# Altium PCB epic.PcbDoc
Units mm, origin at the board's own origin, x right, y up, seen from the top; angles counter-clockwise.
Board outline 36.98 x 50.8 mm, 2 copper layers (Top Layer, Bottom Layer); 67 components, 52 nets, 308 pads, 144 vias.
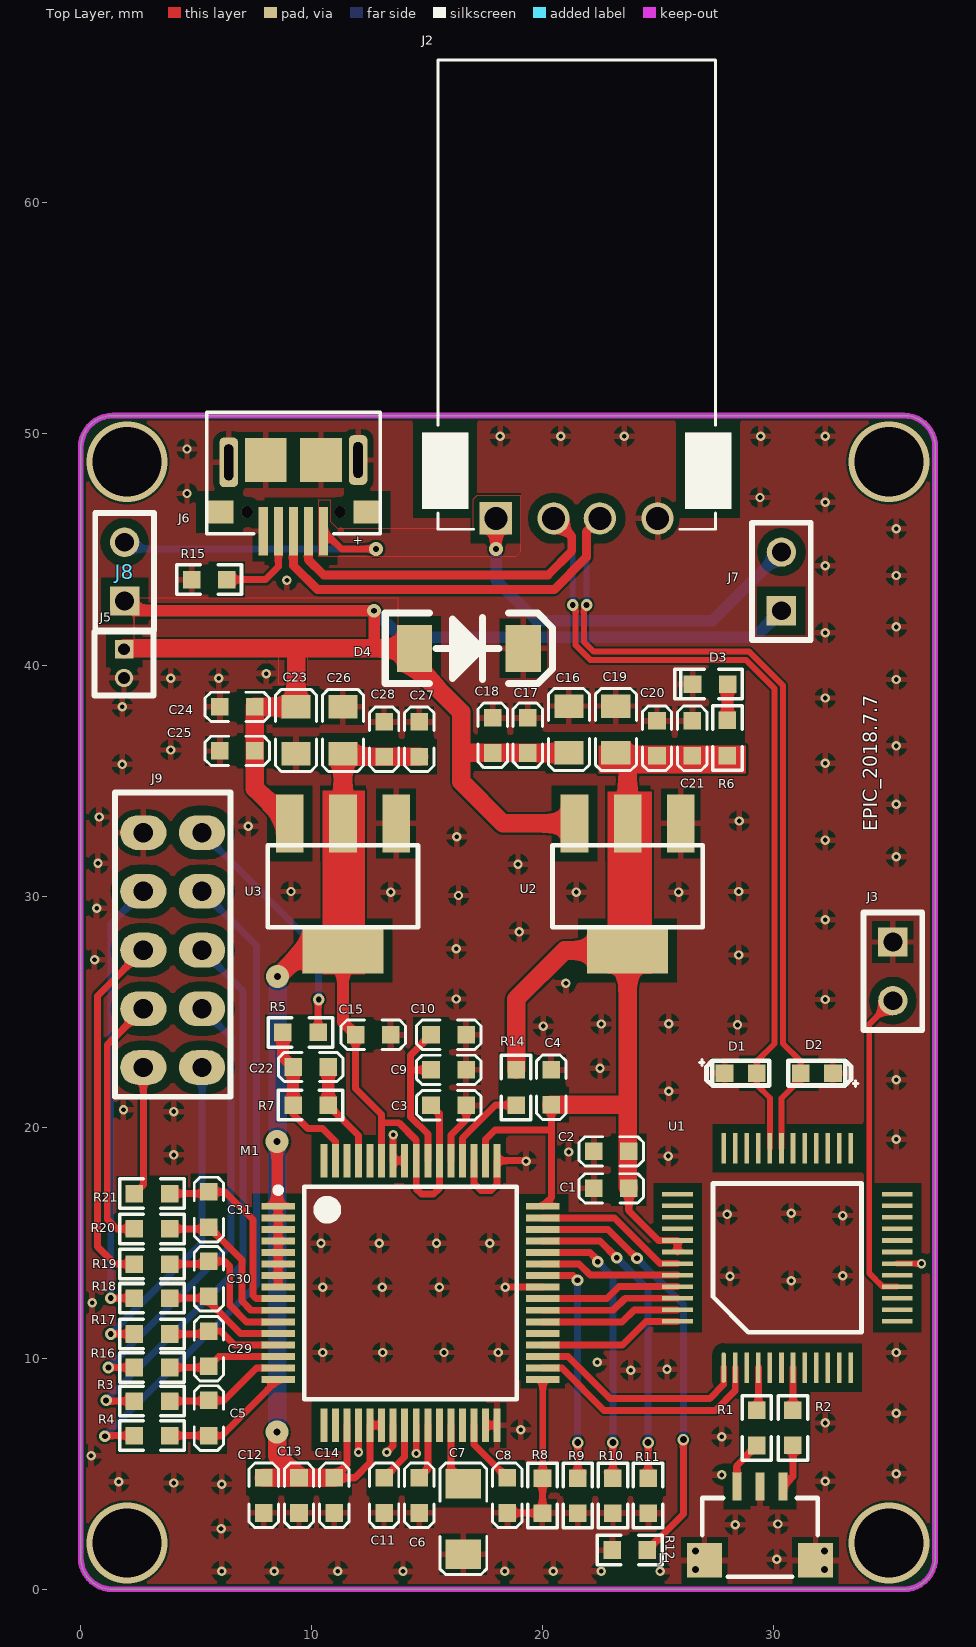
[diagram p0: Top Layer view]
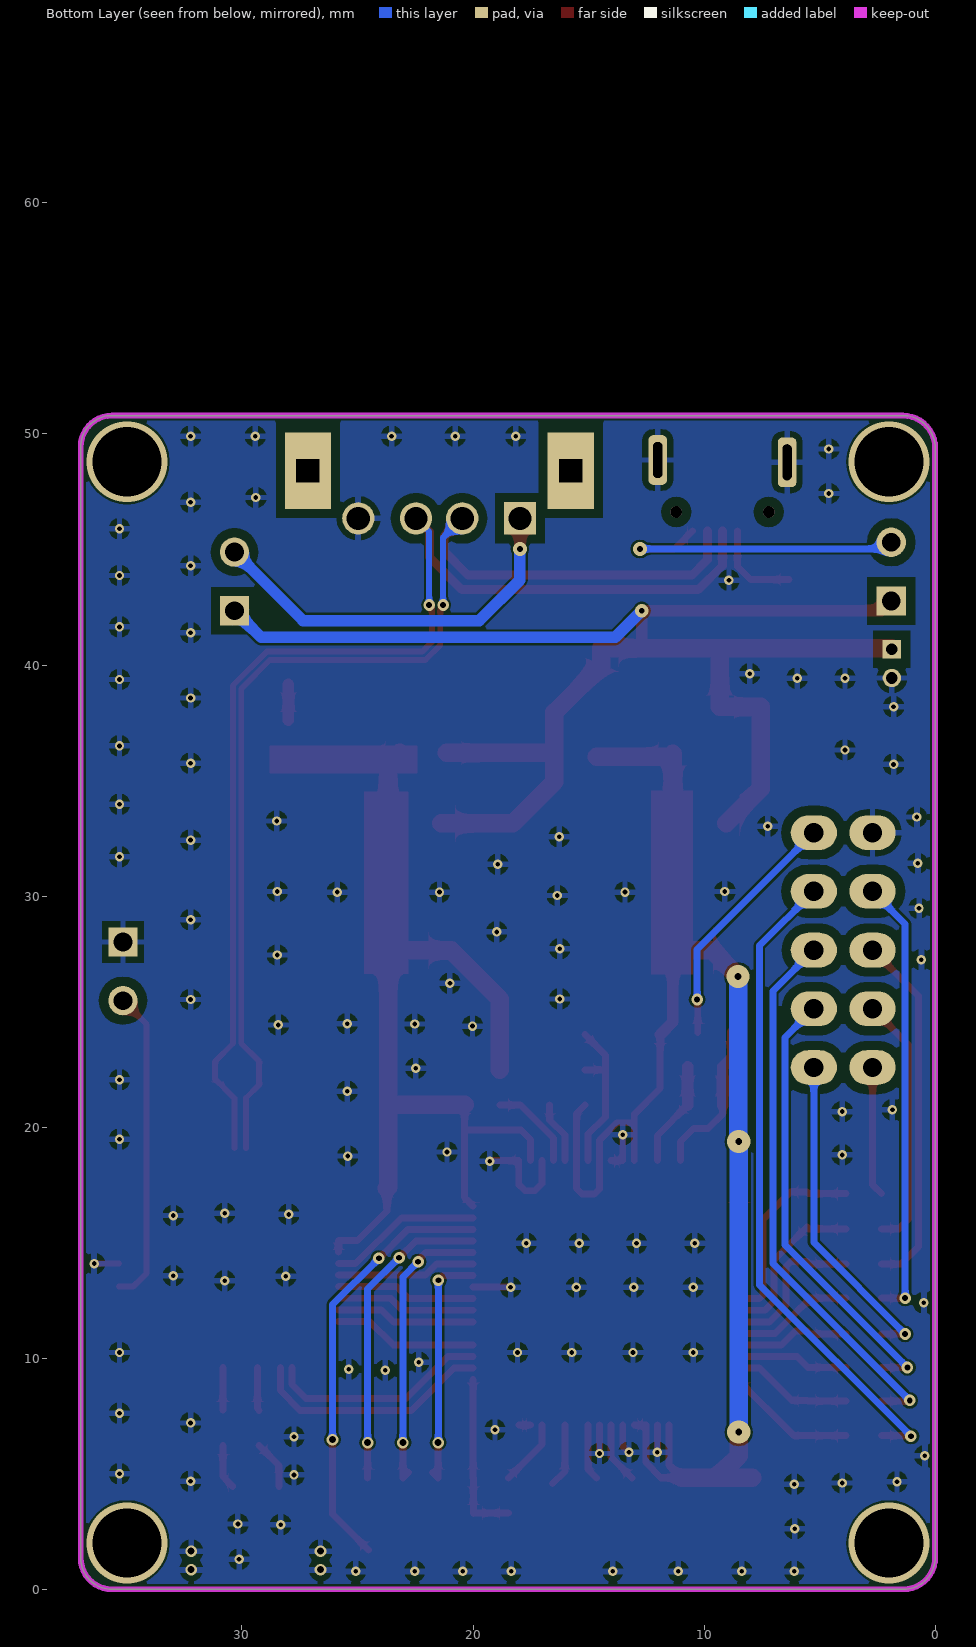
[diagram p1: Bottom Layer view, seen from below]
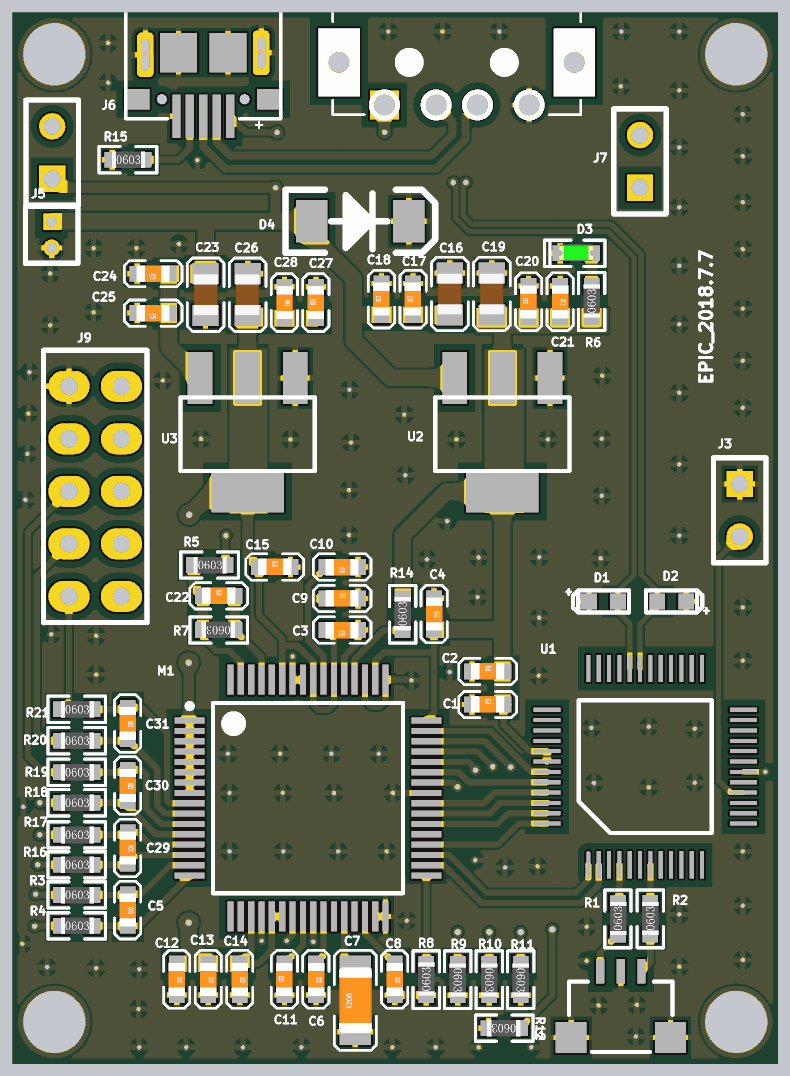
[diagram p2: 3D render of the assembled board from above, using the file's embedded part models]

## Layer stack, top to bottom
Top Solder: solder mask 0.0102, Solder Resist, Dk 3.5
Top Layer: signal copper 0.0356
Dielectric 1: dielectric 0.32, FR-4, Dk 4.8
Bottom Layer: signal copper 0.0356
Bottom Solder: solder mask 0.0102, Solder Resist, Dk 3.5

## Board outline
1.375,0 cw(c1.375,1.375) 0,1.375 0,49.4 cw(c1.4,49.4) 1.4,50.8 35.625,50.8 cw(c35.625,49.445) 36.98,49.445 36.98,1.355 cw(c35.625,1.355) 35.625,0

## Design rules (kind name [scope] priority, off if disabled: settings)
Clearance [All] p1: gap=0.1 except(0.4: SMDPad-Poly THPad-Poly)
DiffPairsRouting [All] p1: maxlimit=0.254 minlimit=0.1 mostfreqgap=0.1 toplayer_minwidth=0.2 toplayer_maxwidth=0.381 toplayer_prefwidth=0.2 bottomlayer_minwidth=0.2 bottomlayer_maxwidth=0.381 bottomlayer_prefwidth=0.2 maxuncoupledlength=12.7
HoleToHoleClearance [All] p1: gap=0.051 allowstackedmicrovias=TRUE
MinimumSolderMaskSliver [All] p1: minsoldermaskwidth=0.051
PolygonConnect [All] p1: connectstyle=Relief reliefconductorwidth=0.254 reliefentries=4 polygonreliefangle="90 Angle" airgapwidth=0.254
RoutingVias [All] p1: holewidth=0.254 width=0.5 viastyle="Through Hole" minholewidth=0.254 minwidth=0.5 maxholewidth=0.3 maxwidth=1.27
SilkToSilkClearance [All] p1: silktosilkclearance=0.051
SilkToSolderMaskClearance [IsPad] p1: minsilkscreentomaskgap=0.051 clearancetoexposedcopper=TRUE
SolderMaskExpansion [All] p1: expansion=0.102
Width [All] p1: maxlimit=0.8 minlimit=0.254 preferedwidth=0.6
25 further rules are at their usual default settings.

## Components (designator, comment, footprint, x,y, rotation, side; value= is the part's Value field where it differs from the comment)
C1 "104K50V" C0603 22.201,17.35 r0 top
C2 "106K50V" C0603 22.201,18.95 r0 top
C3 "105K16V" C0603 16.685,20.955 r180 top
C4 "105K16V" C0603 20.368,22.492 r270 top
C5 "101K10V" C0603 5.55,8.174 r270 top
C6 "105K16V" C0603 14.653,4.826 r270 top
C7 "C1206 100uF" C1206 16.558,1.524 r90 top
C8 "105K16V" C0603 18.463,4.826 r270 top
C9 "105K16V" C0603 15.161,22.479 r0 top
C10 "104K50V" C0603 16.685,24.003 r180 top
C11 "106K50V" C0603 13.129,3.302 r90 top
C12 "105K16V" C0603 7.922,4.826 r270 top
C13 "105K16V" C0603 9.446,4.826 r270 top
C14 "105K16V" C0603 10.97,4.826 r270 top
C15 "105K16V" C0603 11.901,24.003 r0 top
C16 "226M50V" C0805 21.13,36.195 r90 top
C17 "106K50V" C0603 19.352,36.195 r90 top
C18 "105K16V" C0603 17.828,36.195 r90 top
C19 "226M50V" C0805 23.162,36.195 r90 top
C20 "105K16V" C0603 24.94,36.068 r90 top
C21 "104K50V" C0603 26.464,37.592 r270 top
C22 "152K16V" C0603 9.192,22.606 r0 top
C23 "226M50V" C0805 9.319,38.188 r270 top
C24 "106K50V" C0603 7.541,38.188 r180 top
C25 "105K16V" C0603 7.541,36.283 r180 top
C26 "226M50V" C0805 11.351,36.156 r90 top
C27 "105K16V" C0603 14.653,36.029 r90 top
C28 "104K50V" C0603 13.129,37.553 r270 top
C29 "101K10V" C0603 5.55,11.175 r270 top
C30 "101K10V" C0603 5.55,14.199 r270 top
C31 "101K10V" C0603 5.55,17.199 r270 top
D1 "ESDA_TR1/0603" HS_0603D 28.559,22.34 r0 top
D2 "ESDA_TR1/0603" HS_0603D 31.861,22.34 r180 top
D3 "LED0603G" D-LED0603G 28,39.175 r180 top
D4 "SMAJ5.0CA" DO-214 14.45,40.725 r0 top
J1 "SH1.0-T-1-LT-3A" J-SH1.0-T-1-LT-3A 30.4,4.45 r180 top
J2 "Header 4" USB-AB 17.967,46.349 r0 top
J3 "S2.54-2P" S2.54-2P 35.15,28.015 r270 top
J5 "J-ZH1.25" ZH1.25_2P 1.875,40.69 r270 top
J6 "USB-MINI-SOCKET" "MICRO-USB - 5.9" 12.956,50.932 r180 top
J7 "S2.54-2P" S2.54-2P 30.325,42.35 r90 top
J8 "S2.54-2P" S2.54-2P 1.9,42.775 r90 top
J9 "D2.54-2X5P" D2.54-2X5P 2.71,22.585 r90 top
M1 "ADS1299" ADS1299-TSQFP50P1200X1200X105-64N 14.272,12.827 r0 top
R1 "22RF" R0603 29.258,6.223 r90 top
R2 "22RF" R0603 30.825,6.226 r90 top
R3 "10KF" R0603 2.326,8.144 r0 top
R4 "10KF" R0603 2.326,6.65 r0 top
R5 "10KF" R0603 8.751,24.1 r0 top
R6 "2KF" R0603 27.988,36.081 r90 top
R7 "1MF" R0603 10.716,20.955 r180 top
R8 "0R" R0603 19.987,3.289 r90 top
R9 "10KF" R0603 21.511,4.813 r270 top
R10 "10KF" R0603 23.035,4.813 r270 top
R11 "10KF" R0603 24.559,4.813 r270 top
R12 "10KF" R0603 24.525,1.7 r180 top
R14 "10KF" R0603 18.844,20.955 r90 top
R15 "0R" R0603 4.8,43.7 r0 top
R16 "10KF" R0603 2.326,9.6 r0 top
R17 "10KF" R0603 2.326,11.05 r0 top
R18 "10KF" R0603 2.326,12.6 r0 top
R19 "10KF" R0603 2.326,14.075 r0 top
R20 "10KF" R0603 2.326,15.6 r0 top
R21 "10KF" R0603 2.326,17.125 r0 top
U1 "CH559L" LQFP48 27.829,9.597 r90 top
U2 "AMS1117-3.3V" SOT-223 23.67,33.147 r180 top
U3 "AMS1117-5V" SOT-223 11.351,33.147 r180 top

## Footprints (in the part's own frame and the unit in brackets; to place one, negate y for a bottom-side part, rotate by r counter-clockwise, add the part's x,y. Pads: shape width x height; smd on the part's side, far side on the other; paste and mask are expansions set on the pad)
ADS1299-TSQFP50P1200X1200X105-64N [mm] "TSQFP, 64-Leads, Body 10.00x10.00mm, Pitch 0.50mm, IPC Medium Density"
  rect 1.45x0.3 smd: 1(-5.725,3.75) 2(-5.725,3.25) 3(-5.725,2.75) 4(-5.725,2.25) 5(-5.725,1.75) 6(-5.725,1.25) 7(-5.725,0.75) 8(-5.725,0.25) 9(-5.725,-0.25) 10(-5.725,-0.75) 11(-5.725,-1.25) 12(-5.725,-1.75) 13(-5.725,-2.25) 14(-5.725,-2.75) 15(-5.725,-3.25) 16(-5.725,-3.75) 33(5.725,-3.75) 34(5.725,-3.25) 35(5.725,-2.75) 36(5.725,-2.25) 37(5.725,-1.75) 38(5.725,-1.25) 39(5.725,-0.75) 40(5.725,-0.25) 41(5.725,0.25) 42(5.725,0.75) 43(5.725,1.25) 44(5.725,1.75) 45(5.725,2.25) 46(5.725,2.75) 47(5.725,3.25) 48(5.725,3.75)
  rect 0.3x1.45 smd: 17(-3.75,-5.725) 18(-3.25,-5.725) 19(-2.75,-5.725) 20(-2.25,-5.725) 21(-1.75,-5.725) 22(-1.25,-5.725) 23(-0.75,-5.725) 24(-0.25,-5.725) 25(0.25,-5.725) 26(0.75,-5.725) 27(1.25,-5.725) 28(1.75,-5.725) 29(2.25,-5.725) 30(2.75,-5.725) 31(3.25,-5.725) 32(3.75,-5.725) 49(3.75,5.725) 50(3.25,5.725) 51(2.75,5.725) 52(2.25,5.725) 53(1.75,5.725) 54(1.25,5.725) 55(0.75,5.725) 56(0.25,5.725) 57(-0.25,5.725) 58(-0.75,5.725) 59(-1.25,5.725) 60(-1.75,5.725) 61(-2.25,5.725) 62(-2.75,5.725) 63(-3.25,5.725) 64(-3.75,5.725)
  silkscreen extent -5.85,-4.6 4.6,4.6, body extent -5,-5 5,5, height 1.05
C0603 [mil]
  rect 30x30 smd: 1(0,0) 2(60,0)
  silkscreen extent -25,-25 85,25, body extent -1,-15 61,16, height 12
C0805 [mil]
  rect 40x50 smd: 1(0,0) 2(80,0)
  silkscreen extent -30,-35 110,35, body extent 1,-23 79,24, height 37
C1206 [mil]
  rect 50x60 smd: 1(0,0) 2(120,0)
  silkscreen extent -35,-40 155,40, body extent -3,-32 123,31, height 39
D2.54-2X5P [mm] "DUAL_ROW_Pin_R2.54-5P"
  oval 1.5x2 hole 0.838: 1(0,0) 2(0,-2.54) 3(2.54,0) 4(2.54,-2.54) 5(5.08,0) 6(5.08,-2.54) 7(7.62,0) 8(7.62,-2.54) 9(10.16,0) 10(10.16,-2.54)
  silkscreen extent -1.27,-3.77 11.9,1.23, body extent -1.27,-3.82 11.6,1.26, height 10
D-LED0603G [mil]
  rect 30x30 smd: 1(0,0) 2(60,0)
  silkscreen extent -25,-25 90,25, body extent -2,-16 62,15, height 24
DO-214 [mil]
  rect 60x80 smd: 1(0,0) 2(185,0)
  silkscreen extent -50,-60 235,60
HS_0603D [mil]
  rect 30x30 smd: 1(-27.5,0) 2(27.5,0)
  silkscreen extent -70,-21 49,23
J-SH1.0-T-1-LT-3A [mm]
  rect 0.4x1.2 smd: 1(0,0) 2(1,0) 3(2,0)
  rect 1.5x1.5 smd: 4(-1.4,3.2) 5(3.4,3.2)
  silkscreen extent -1.5,0.5 3.5,3.9
LQFP48 [mm]
  oval 1.321x0.2 smd: 1(0,0)
  rect 1.321x0.2 smd: 2(0,-0.5) 3(0,-1) 4(0,-1.5) 5(0,-2) 6(0,-2.5) 7(0,-3) 8(0,-3.5) 9(0,-4) 10(0,-4.5) 11(0,-5) 12(0,-5.5) 25(9.5,-5.5) 26(9.5,-5) 27(9.5,-4.5) 28(9.5,-4) 29(9.5,-3.5) 30(9.5,-3) 31(9.5,-2.5) 32(9.5,-2) 33(9.5,-1.5) 34(9.5,-1) 35(9.5,-0.5) 36(9.5,0)
  rect 0.2x1.321 smd: 13(2,-7.5) 14(2.5,-7.5) 15(3,-7.5) 16(3.5,-7.5) 17(4,-7.5) 18(4.5,-7.5) 19(5,-7.5) 20(5.5,-7.5) 21(6,-7.5) 22(6.5,-7.5) 23(7,-7.5) 24(7.5,-7.5) 37(7.5,2) 38(7,2) 39(6.5,2) 40(6,2) 41(5.5,2) 42(5,2) 43(4.5,2) 44(4,2) 45(3.5,2) 46(3,2) 47(2.5,2) 48(2,2)
  silkscreen extent 1.54,-5.96 7.96,0.47
"MICRO-USB - 5.9" [mm]
  rect 1.2x1 smd: 0(0.55,4.307) 0(6.95,4.307)
  rect 0.4x2.1 smd: 1(2.45,5.132) 2(3.1,5.132) 3(3.75,5.132) 4(4.4,5.132) 5(5.05,5.132)
  rrect50% 0.8x2.15 hole 0.4 slot 1.55 at 90 deg: 6(0.95,2.057) 6(6.55,2.157)
  rect 1.8x1.9 smd: 6(2.556,2.057) 6(4.943,2.057)
  round 0.5 hole 0.5 unplated: ""(1.75,4.307) ""(5.75,4.307)
  silkscreen extent 0,0 7.5,5.25
R0603 [mil]
  rect 30x30 smd: 1(0,0) 2(60,0)
  silkscreen extent -25,-25 85,25, body extent 0,-16 62,15, height 18
S2.54-2P [mil]
  rect 50x50 hole 32: 1(0,0)
  round 50 hole 32: 2(100,0)
  silkscreen extent -50,-50 150,50, body extent -50,-50 150,50, height 315
SOT-223 [mm]
  rect 1.2x2.5 smd: 1(-2.3,0) 2(0,0) 3(2.3,0)
  rect 3.5x2 smd: 2(0,5.5)
  silkscreen extent -3.25,0.94 3.25,4.5
USB-AB [mm]
  rect 2x3.3 hole 1 square: 0(-2.199,2.06) 0(9.18,2.06)
  round 0.127 on Mech4: 1(-2.59,1.32) 1(-2.59,1.32) 1(-2.59,2.8) 1(-2.59,2.8) 1(-2.5,-0.47) 1(-2.5,-0.47) 1(-2.5,0.23) 1(-2.5,4.03) 1(-2.5,19.83) 1(-2.5,19.83) 1(-1.79,1.32) 1(-1.79,1.32) 1(-1.79,2.8) 1(-1.79,2.8) 1(-0.973,-0.47) 1(7.969,-0.47) 1(8.79,1.32) 1(8.79,1.32) 1(8.79,2.8) 1(8.79,2.8) 1(9.5,-0.47) 1(9.5,-0.47) 1(9.5,0.23) 1(9.5,4.03) 1(9.5,19.83) 1(9.5,19.83) 1(9.59,1.32) 1(9.59,1.32) 1(9.59,2.8) 1(9.59,2.8)
  rect 1.397x1.397 hole 1: 1(0,0)
  round 1.5 on Top Overlay: 1(0,0) 1(2.5,0) 1(4.5,0) 1(7,0)
  round 1.4 on Top Overlay: 1(1.2,2.06) 1(5.8,2.06)
  round 1.397 hole 1: 2(2.5,0) 3(4.5,0) 4(7,0)
  silkscreen extent -3.19,-0.47 10.19,19.83
ZH1.25_2P [mm] "ZH1.25的电池"
  rect 0.8x0.8 hole 0.5: 1(0,0)
  round 0.8 hole 0.5: 2(1.25,0)
  silkscreen extent -0.75,-1.27 2,1.27, body extent -0.41,-0.41 0.39,0.39, height 8

## Part data
C1 C10 C21 C28: library part C0603X7R-104K50V, "贴片电容-陶瓷"
C2 C11 C17 C24: library part C0603X7R-106K50V, "贴片电容-陶瓷"
C3 C4 C6 C8 C9 C12 C13 C14 C15 C18 C20 C25 C27: library part C0603X7R-105K16V, "贴片电容-陶瓷"
C5 C29 C30 C31: library part C0603X7R-101K10V, "贴片电容-陶瓷"
C7: library part "C1206钽电容 --100UF"
C16 C19 C23 C26: library part C0805Y5V-226M50V, "贴片电容-陶瓷"
C22: library part C0603X7R-152K16V, "贴片电容-陶瓷"
D1 D2: library part "D Zener", "Zener Diode"
D3: library part DLED-0603-G, "贴片二极管-LED"
J1: "接插件-SH1.0-T-1-LT-3A"
J2: "Header, 4-Pin"
J3 J7 J8: library part J-S2.54-2P, "单排排针-直针"
J6: library part J-USB-MINI-SOCKET, "USB-A卧式插座"
J9: library part J-D2.54-2X5P, "双排排针-直针"
M1: "ADS1299-S-PQFP-64"
R1 R2: library part R0603-22RF, "贴片电阻-通用"
R3 R4 R5 R9 R10 R11 R12 R14 R16 R17 R18 R19 R20 R21: library part R0603-10KF, "贴片电阻-通用"
R6: library part R0603-2KF, "贴片电阻-通用"
R7: library part R0603-1MF, "贴片电阻-通用"
R8 R15: library part R0603-0R, "贴片电阻-通用"
U1: "单片机"
U2: library part "AP1117-33 SOT-223", "芯片 电源类"
U3: "线性稳压器"

## Via types
v1: diameter 0.406, hole 0.203, Top Layer to Bottom Layer, tented both sides, 114 vias
v2: diameter 0.5, hole 0.254, Top Layer to Bottom Layer, tented both sides, 12 vias
v3: diameter 0.5, hole 0.3, Top Layer to Bottom Layer, tented both sides, 4 vias
v4: diameter 3.5/3.5 (per signal layer), hole 3, Top Layer to Bottom Layer, tented both sides, 4 vias
v5: diameter 0.508, hole 0.305, Top Layer to Bottom Layer, tented both sides, 4 vias
v6: diameter 0.6, hole 0.254, Top Layer to Bottom Layer, tented both sides, 3 vias
v7: diameter 1, hole 0.3, Top Layer to Bottom Layer, tented both sides, 3 vias

## Nets (pads, with @x,y where several pads share a name; then routed paths per layer and width w, separated by ;. In a path a pad name is that pad's centre, name@x,y a point inside that pad or via, vN(x,y) a via of type N, cw(c..) or ccw(c..) an arc to the next point about the centre after c; other vN are vias at no path point)
/CS: M1.39 U1.46 | length 6
  Top Layer w0.3: M1.39 23.047,12.077 23.567,12.597 U1.46
/DRDY: M1.47 U1.43 | length 6.7
  Top Layer w0.3: M1.47 23.098,16.077 25.078,14.097 U1.43
/PWDN: M1.35 U1.1 | length 9.6
  Top Layer w0.3: M1.35 21.086,10.077 22.908,8.255 27.226,8.255 27.829,8.858 U1.1
/RESET: M1.36 U1.48 | length 6.3
  Top Layer w0.3: M1.36 23.452,10.577 24.472,11.597 U1.48
BIAS1: J9.10 R5.2 | length 10.7
  Top Layer w0.3: R5.2 10.275,25.5 v2(10.3,25.525)
  Bottom Layer w0.3: J9.10 10.3,27.695 v2(10.3,25.525)
BIASINV: C22.2 M1.61 R7.1 | length 4.6
  Top Layer w0.3: R7.1 12.022,19.649 M1.61
  Top Layer w0.5: R7.1 C22.2
BIASOUT: C22.1 M1.63 R5.1 R7.2 | length 6.9
  Top Layer w0.3: R7.2 9.192,20.574 9.827,19.939 10.462,19.939 11.022,19.379 M1.63
  Top Layer w0.5: R5.1 8.751,23.047 C22.1 R7.2
CLKSEL: M1.52 R14.1 | length 3.9
  Top Layer w0.3: M1.52 16.522,19.522 17.955,20.955 R14.1
DIN: M1.34 U1.2 | length 10.4
  Top Layer w0.3: M1.34 20.824,9.577 22.654,7.747 27.48,7.747 28.329,8.596 U1.2
DM: D1.2 J2.2 J6.2 U1.32 | length 50.8
  Top Layer w0.254: v2(21.298,42.6) 21.421,42.477 21.421,40.857 22.053,40.225 28.783,40.225 30.033,38.975 30.033,23.623 29.258,22.848 D1.2 29.258,21.832 29.829,21.261 U1.32
  Top Layer w0.381: J6.2 9.856,44.559 10.515,43.9 20.225,43.9 21.25,44.925 21.25,45.566 J2.2
  Bottom Layer w0.254: J2.2 21.298,45.518 v2(21.298,42.6)
DOUT: M1.43 U1.44 | length 6
  Top Layer w0.3: M1.43 21.573,14.077 22.053,13.597 U1.44
DP: D2.2 J2.3 J6.3 U1.31 | length 52.8
  Top Layer w0.254: v2(21.898,42.6) 21.775,42.477 21.775,41.004 22.2,40.579 28.93,40.579 30.387,39.122 30.387,23.623 31.163,22.848 D2.2 31.163,22.088 30.329,21.254 U1.31
  Top Layer w0.381: J6.3 9.206,44.311 10.252,43.265 20.488,43.265 21.885,44.662 21.885,45.767 J2.3
  Bottom Layer w0.254: v2(21.898,42.6) 21.898,45.78 J2.3
GND: C1.1 C2.1 C3.1 C4.1 C6.2 C7.1 C8.2 C9.2 C10.1 C11.1 C12.2 C13.2 C14.2 C15.2 C16.2 C17.2 C18.2 C19.2 C20.2 C21.1 C23.2 C24.2 C25.2 C26.2 C27.2 C28.1 D1.1 D2.1 D3.2 D4.2 J1.2 J1.4 J1.5 J2.4 J3.1 J5.2 J6.5 J6.6 J9.9 M1.20 M1.23 M1.25 M1.31 M1.32 M1.33 M1.41 M1.49 M1.51 M1.53 M1.57 M1.58 R8.1 R8.2 R9.2 R10.2 R11.2 R12.2 R15.1 U1.18 U2.1 U3.1 | length 23
  Top Layer w0.254: U1.18 v1(36.389,14.097)
  Top Layer w0.3: M1.20 12.022,5.928 v1(12.025,5.925) ; v1(13.25,5.925) 13.522,6.197 M1.23 ; v1(13.525,19.675) 13.522,19.672 M1.58 M1.57 ; M1.25 14.522,5.878 v1(14.525,5.875) ; M1.53 16.022,19.657 16.685,20.32 C3.1 ; M1.51 17.022,17.553 17.325,17.25 17.749,17.25 18.022,17.523 M1.49 19.248,18.552 v1(19.275,18.525) ; M1.31 M1.32 ; v1(18.375,13.075) 18.377,13.077 M1.41 ; C8.2 19.974,3.302 R8.1 R8.2 19.997,4.823 M1.33
  other v1: 6.1,0.775 8.375,0.775 11.125,0.775 13.95,0.775 18.35,0.775 20.45,0.775 22.525,0.775 25.075,0.775 30.125,1.3 6.075,2.625 28.325,2.8 30.175,2.825 6.1,4.55 4.025,4.6 1.65,4.65 32.225,4.675 27.75,4.95 35.3,5 0.45,5.775 27.75,6.6 19.05,6.9 32.225,7.2 35.3,7.625 23.8,9.475 25.375,9.525 22.35,9.825 10.475,10.25 13.075,10.25 15.725,10.25 18.075,10.25 35.3,10.25 0.5,12.4 10.475,13.075 13.05,13.075 15.525,13.075 30.75,13.35 28.1,13.55 32.975,13.575 10.4,14.975 12.925,14.975 15.4,14.975 17.7,14.975 32.975,16.175 27.975,16.225 30.75,16.275 25.425,18.75 4.025,18.8 21.125,18.925 35.3,19.475 4.025,20.675 1.85,20.75 25.45,21.55 35.3,22.05 22.475,22.55 20.025,24.375 28.425,24.425 22.523,24.466 25.45,24.475 32.225,25.525 16.25,25.55 21,26.225 0.6,27.25 28.475,27.45 16.25,27.725 18.975,28.45 32.225,28.975 0.7,29.475 16.35,30.025 13.425,30.175 21.45,30.175 25.875,30.175 9.1,30.2 28.475,30.2 18.925,31.375 0.75,31.425 35.3,31.7 32.225,32.425 16.275,32.575 7.25,33.025 28.5,33.25 0.8,33.425 35.3,33.975 1.8,35.7 32.225,35.75 3.902,36.323 35.3,36.5 1.8,38.2 32.225,38.575 35.3,39.375 3.902,39.423 5.975,39.425 8.025,39.625 32.225,41.4 35.3,41.65 8.925,43.675 35.3,43.875 32.225,44.3 35.3,45.9 32.225,47.05 29.4,47.25 4.6,47.425 4.6,49.35 18.15,49.9 20.775,49.9 23.525,49.9 29.425,49.9 32.225,49.9
  other v5: 26.6,0.85 32.2,0.85 26.6,1.65 32.2,1.65
GPIO1: M1.42 R9.1 | length 10.5
  Top Layer w0.3: M1.42 21.298,13.577 v2(21.5,13.375) ; v3(21.511,6.35) R9.1 R9.1@21.753,5.055
  Bottom Layer w0.3: v2(21.5,13.375) 21.5,6.361 v3(21.511,6.35)
GPIO2: M1.44 R10.1 | length 12.6
  Top Layer w0.3: M1.44 22.05,14.577 22.375,14.252 v2(22.375,14.175) ; R10.1@22.781,5.067 R10.1 v3(23.035,6.35)
  Bottom Layer w0.3: v2@22.311,14.175 v2(22.375,14.175) 23.035,13.515 v3(23.035,6.35)
GPIO3: M1.45 R11.1 | length 13.6
  Top Layer w0.3: M1.45 22.473,15.077 v2(23.2,14.35) ; R11.1 v3(24.559,6.35)
  Bottom Layer w0.3: v2(23.2,14.35) 24.559,12.991 v3(24.559,6.35)
GPIO4: M1.46 R12.1 | length 18.7
  Top Layer w0.3: M1.46 22.825,15.577 v2(24.077,14.325) ; R12.1 26.083,3.258 v3(26.083,6.477)
  Bottom Layer w0.3: v2(24.077,14.325) 26.083,12.319 v3(26.083,6.477)
IN1N: J9.6 R3.1 | length 23.9
  Top Layer w0.3: v2(1.1,8.175) 1.131,8.144 R3.1
  Bottom Layer w0.3: v2(1.1,8.175) 7.025,14.1 7.025,25.89 J9.6
IN1P: J9.8 R4.1 | length 28.6
  Top Layer w0.3: v2(1.05,6.625) 1.075,6.65 R4.1
  Bottom Layer w0.3: v2(1.05,6.625) 7.6,13.175 7.6,27.855 J9.8
IN1P_1: C5.2 M1.16 R4.2 | length 5.7
  Top Layer w0.3: R4.2 C5.2 6.12,6.65 M1.16
IN1P_2: C5.1 M1.15 R3.2 | length 5.3
  Top Layer w0.3: R3.2 5.52,8.144 C5.1 6.199,8.174 7.602,9.577 M1.15
IN2N: J9.2 R17.1 | length 14.2
  Top Layer w0.3: v2(1.3,11.05) R17.1
  Bottom Layer w0.3: v2(1.3,11.05) 5.25,15 J9.2
IN2P: J9.4 R16.1 | length 19.4
  Top Layer w0.3: v2(1.2,9.6) R16.1
  Bottom Layer w0.3: v2(1.2,9.6) 6.5,14.9 6.5,23.875 J9.4
IN2P_1: C29.2 M1.14 R16.2 | length 4.9
  Top Layer w0.3: R16.2 5.499,9.6 C29.2 5.976,10.077 M1.14
IN2P_2: C29.1 M1.13 R17.2 | length 5
  Top Layer w0.3: R17.2 5.425,11.05 C29.1 6.05,11.175 6.648,10.577 M1.13
IN3N: J9.5 R19.1 | length 15.6
  Top Layer w0.3: R19.1 1.475,14.075 0.725,14.825 0.725,25.68 J9.5
IN3P: J9.7 R18.1 | length 19.2
  Top Layer w0.3: v2(1.3,12.6) R18.1
  Bottom Layer w0.3: v2(1.3,12.6) 1.3,28.795 J9.7
IN3P_1: C30.2 M1.12 R18.2 | length 5.5
  Top Layer w0.3: R18.2 5.475,12.6 C30.2 5.55,12.45 6.923,11.077 M1.12
IN3P_2: C30.1 M1.11 R19.2 | length 6.8
  Top Layer w0.3: R19.2 5.426,14.075 C30.1 6.226,14.199 6.45,13.975 6.45,12.3 7.173,11.577 M1.11
IN4N: J9.1 R21.1 | length 5.6
  Top Layer w0.3: R21.1 2.71,17.509 J9.1
IN4P: J9.3 R20.1 | length 11.1
  Top Layer w0.3: R20.1 1.575,15.6 1.15,16.025 1.15,23.565 J9.3
IN4P_1: C31.2 M1.10 R20.2 | length 7.3
  Top Layer w0.3: R20.2 5.475,15.6 C31.2 6.975,14.25 6.975,12.475 7.373,12.077 M1.10
IN4P_2: C31.1 M1.9 R21.2 | length 8.6
  Top Layer w0.3: R21.2 5.476,17.125 C31.1 6.251,17.199 7.45,16 7.45,12.725 7.598,12.577 M1.9
NetC6_1: C6.1 M1.26 | length 2.4
  Top Layer w0.3: C6.1 15.022,5.195 M1.26
NetC7_2: C7.2 M1.28 | length 2.8
  Top Layer w0.3: M1.28 16.022,5.108 C7.2
NetC8_1: C8.1 M1.30 | length 2.9
  Top Layer w0.3: M1.30 17.022,6.267 C8.1
NetC9_1: C9.1 C10.2 M1.55 | length 7
  Top Layer w0.3: M1.55 15.022,19.697 14.272,20.447 14.272,22.479 ; C9.1 14.272,22.479 ; C10.2 14.272,23.114 14.272,22.479
NetC11_2: C11.2 M1.24 | length 2.6
  Top Layer w0.3: C11.2 14.022,5.719 M1.24
NetD3_1: D3.1 R6.2 | length 1.6
  Top Layer w0.5: R6.2 27.988,39.163 D3.1
NetJ1_1: J1.1 R2.1 | length 2
  Top Layer w0.3: J1.1 30.825,4.875 R2.1
NetJ1_3: J1.3 R1.1 | length 2.1
  Top Layer w0.3: J1.3 28.4,5.365 R1.1
NetJ2_1: J2.1@17.967,46.349 J7.2 | length 17
  Top Layer w0.5: J2.1@17.967,46.349 17.967,45.033 v6(17.975,45.025)
  Bottom Layer w0.5: v6(17.975,45.025) 17.975,43.675 19.725,41.925 27.36,41.925 J7.2
NetJ3_2: J3.2 U1.16 | length 13.7
  Top Layer w0.254: J3.2 34.125,24.45 34.125,13.675 34.703,13.097 U1.16
NetJ6_1: J6.1 J8.2 | length 13.6
  Top Layer w0.3: J6.1 11.281,45.025 v6(12.775,45.025)
  Bottom Layer w0.3: J8.2 2.19,45.025 v6(12.775,45.025)
NetJ6_4: J6.4 R15.2 | length 4
  Top Layer w0.3: R15.2 8,43.7 8.556,44.256 J6.4
NetR1_2: R1.2 U1.4 | length 1.9
  Top Layer w0.3: R1.2 29.329,7.818 U1.4
NetR2_2: R2.2 U1.7 | length 1.8
  Top Layer w0.3: R2.2 30.829,7.754 U1.7
SCLK: M1.40 U1.45 | length 6
  Top Layer w0.3: M1.40 22.785,12.577 23.305,13.097 U1.45
START: M1.38 U1.47 | length 6
  Top Layer w0.3: M1.38 23.436,11.577 23.956,12.097 U1.47
VCC_3V3: C1.2 C2.2 C4.2 C19.1 C20.1 C21.2 M1.48 M1.50 R6.1 R14.2 U1.41 U1.42 U2.2 | length 48.4
  Top Layer w0.3: M1.50 17.522,19.472 17.925,19.875 20.368,19.875 ; M1.48 20.368,16.948 20.368,19.875 ; C4.2@20.368,20.955 20.368,19.875 ; C1.2 23.725,16.375 25.003,15.097 U1.41 U1.42
  Top Layer w0.8: R14.2 18.844,25.544 20.947,27.647 U2.2@23.67,27.647 ; C4.2 23.663,20.968 23.67,20.975 ; C19.1 C19.1@23.289,36.068 ; C1.2 23.67,17.405 23.67,20.975 ; R6.1 27.975,36.068 C21.2 C20.1 C19.1@23.289,36.068 ; C19.1@23.289,36.068 23.67,35.687 23.67,33.147 U2.2@23.67,27.647 ; 23.67,20.975 U2.2@23.67,27.647
VCC_5V: C3.2 C12.1 C13.1 C14.1 C15.1 C26.1 C27.1 C28.2 M1.1 M1.2 M1.3 M1.4 M1.5 M1.6 M1.7 M1.8 M1.19 M1.21 M1.22 M1.54 M1.56 M1.59 U3.2 | length 71.7
  Top Layer w0.3: M1.8 M1.7 M1.6 M1.5 M1.4 M1.3 M1.2 M1.1 ; M1.19 11.522,5.378 C14.1 11.861,4.826 12.522,5.487 M1.21 M1.22 ; C15.1 11.901,21.675 13.022,20.554 13.022,20.193 ; M1.59 13.022,20.193 ; C3.2 15.522,20.594 M1.54 15.522,17.347 15.275,17.1 14.75,17.1 14.522,17.328 M1.56 14.522,19.435 13.764,20.193 13.022,20.193
  Top Layer w0.5: v7(8.5,19.375) 8.5,16.624 M1.1 ; U3.2@11.351,27.647 11.351,24.553 C15.1
  Top Layer w0.8: C12.1 C13.1 ; v7(8.5,6.8) 8.5,5.772 C13.1 ; v7(8.525,26.525) 9.647,27.647 11.351,27.647 11.351,33.147 C26.1 11.478,36.029 C28.2 C27.1 ; C14.1 C13.1
  Bottom Layer w0.8: v7(8.5,6.8) v7(8.5,19.375) 8.525,19.4 v7(8.525,26.525)
VCC_BAT: C16.1 C17.1 C18.1 C23.1 C24.1 C25.1 D4.1 J5.1 J7.1 J8.1 U2.3 U3.3 | length 70.7
  Top Layer w0.5: J8.1 2.325,42.35 v6(12.7,42.35) 12.7,40.75 12.675,40.725
  Top Layer w0.8: J5.1 1.91,40.725 9.3,40.725 ; U3.3 7.541,34.657 C25.1 C24.1 C23.1 9.319,40.706 9.3,40.725 ; C16.1 C17.1 C18.1 16.496,36.195 16.476,36.175 ; U2.3 18.278,33.147 16.476,34.949 16.476,36.175 ; 9.3,40.725 12.675,40.725 D4.1 14.45,39.975 16.476,37.949 16.476,36.175
  Bottom Layer w0.5: v6(12.7,42.35) 13.85,41.2 29.175,41.2 J7.1
pads on no net: J2.0 J2.1@15.377,47.669 J2.1@15.377,49.149 J2.1@15.467,45.879 J2.1@15.467,46.579 J2.1@15.467,50.379 J2.1@15.467,66.179 J2.1@16.177,47.669 J2.1@16.177,49.149 J2.1@16.994,45.879 J2.1@17.967,46.349 J2.1@19.167,48.409 J2.1@20.467,46.349 J2.1@22.467,46.349 J2.1@23.767,48.409 J2.1@24.967,46.349 J2.1@25.936,45.879 J2.1@26.757,47.669 J2.1@26.757,49.149 J2.1@27.467,45.879 J2.1@27.467,46.579 J2.1@27.467,50.379 J2.1@27.467,66.179 J2.1@27.557,47.669 J2.1@27.557,49.149 J6. J6.0 M1.17 M1.18 M1.27 M1.29 M1.37 M1.60 M1.62 M1.64 U1.3 U1.5 U1.6 U1.8 U1.9 U1.10 U1.11 U1.12 U1.13 U1.14 U1.15 U1.17 U1.19 U1.20 U1.21 U1.22 U1.23 U1.24 U1.25 U1.26 U1.27 U1.28 U1.29 U1.30 U1.33 U1.34 U1.35 U1.36 U1.37 U1.38 U1.39 U1.40
copper on no net:
  other v4: 2,2 34.98,2 2,48.8 34.98,48.8

## Polygon pours and split planes (outlines as drawn)
GND on Bottom Layer "top" (solid, pour order 38): 0.05,50.85 0.05,0.125 0.175,0 36.95,0 37.025,0.075 37.025,50.8 0.175,50.8 0.1,50.875
GND on Top Layer "top" (solid, pour order 36): 0.05,50.875 0.05,0.15 0.175,0.025 0.25,-0.05 37,-0.05 37,50.775 36.975,50.8 36.925,50.85 0.05,50.85
VCC_BAT on Top Layer "vcc_bat" (solid, pour order 40): 10.3,47.075 10.275,47.05 10.275,44.7 18.85,44.7 19.05,44.9 19.05,47.325 17.15,47.325 17.1,47.275 16.975,47.15 16.975,45.9 11.125,45.9 11.075,45.95 10.825,46.2 10.825,47.125 10.3,47.125 10.275,47.15
VCC_5V on Top Layer "vcc_5v" (solid, pour order 42): 2.25,42.25 2.3,42.2 2.3,40.825 8.705,40.825 8.715,40.815 8.55,40.65 8.55,39.2 9.75,39.2 9.825,39.125 9.825,40.825 13.725,40.825 13.75,40.8 13.75,42.9 2.275,42.9 2.25,42.875 2.325,42.8 2.325,41.775

## Keep-outs
Keep-Out Layer:
  the board outline again, w0.254

## Other copper
Top Layer:
  rectangle net VCC_5V: 10.475,26.6 12.3,34.575
  rectangle net VCC_3V3: 22.8,26.625 24.725,34.525
  rectangle net VCC_3V3: 22.4,35.3 28.8,36.525

## Silkscreen, mask and mechanical layers (free items; w line width, h text height)
Top Overlay:
  text "EPIC_2018.7.7" at 34.483,32.8 h0.6 r90

## Dimensions
0,49.4 to 36.98,49.445 on Keep-Out Layer
1.4,50.8 to 1.375,0 on Keep-Out Layer

## Text inside footprints (layer, text, board x,y; h text height)
J6: Top Overlay "+" at 12.219,45.548 h0.4 r180